# EAGLE board BHONoff (EAGLE 8.3.2)
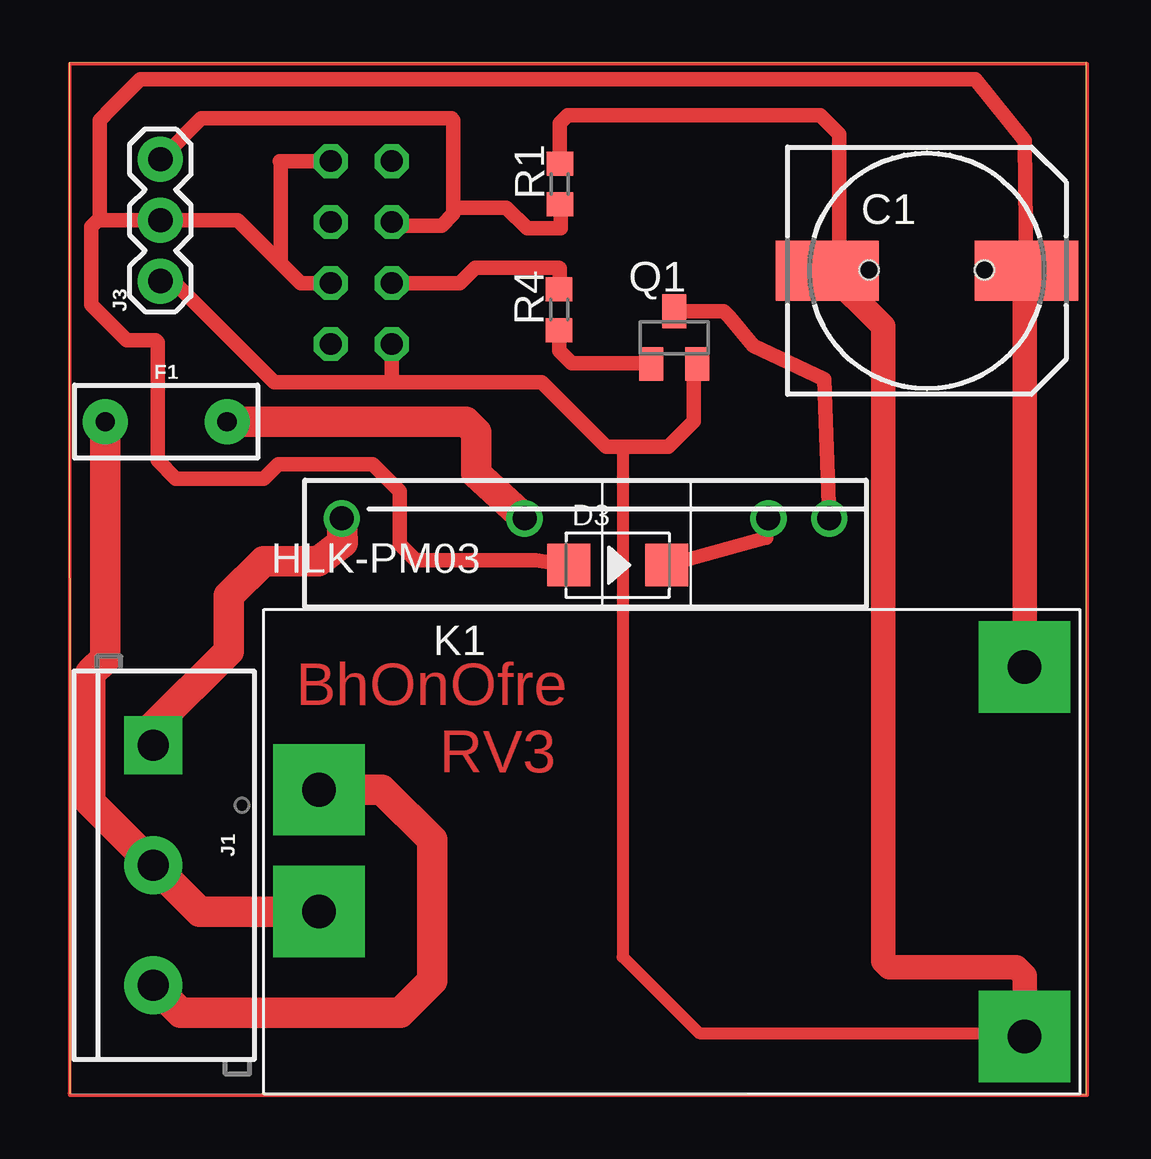
[diagram p0: board, top side]
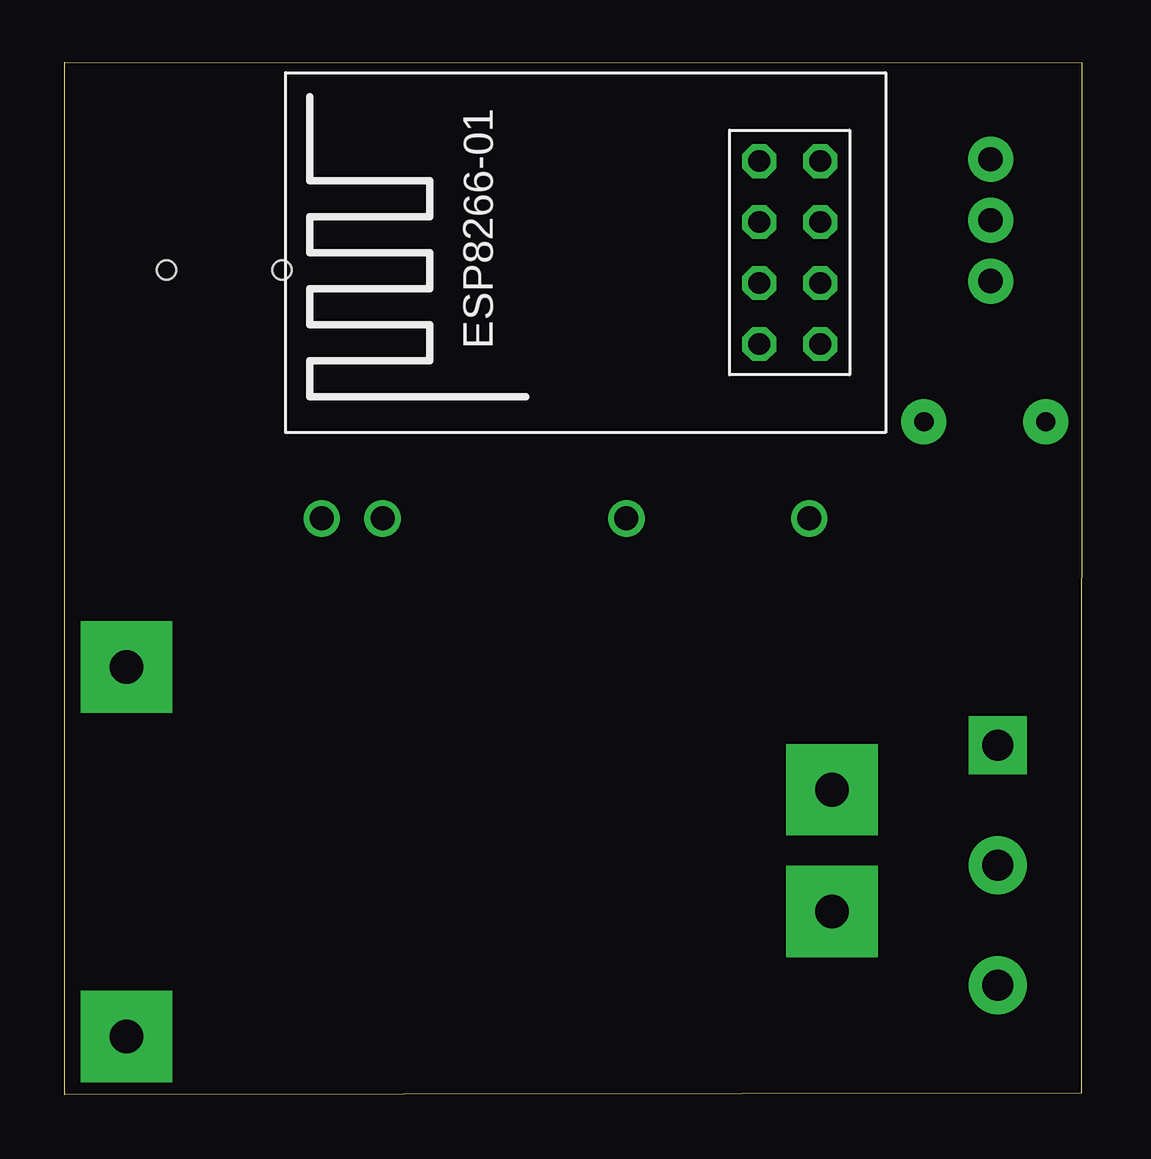
[diagram p1: board, bottom side, seen from below]

Size 42.38 x 43.01 mm. Coordinates in mm from the lower left corner, seen from the top.
Outline: 0.03,0.06 42.38,0 42.38,43.01 0,43 0.03,0.06
Copper layers (1*16): Top 0.035mm / dielectric 1.5mm / Bottom 0.035mm
Design rules "default": minimum track width 6mil, minimum drill 0.35mm, track to track 6mil, track to pad 6mil, pad to pad 6mil, via to via 6mil, smd to smd 6mil, copper to edge 40mil, drill to drill 6mil, minimum pad ring 10mil, minimum via ring 8mil, stop-mask expansion 4mil, vias tented up to drill 0mil, thermal gap 10mil
Net classes: 1 220V: clearance 2.54 mm
Holes 0.8 mm at 33.32,34.36 38.14,34.36

## Footprints (pad centres in the part's own frame; a part is rotated, then mirrored left to right if it is on the bottom)
140CLH-1010 = smd 4.3 x 2.5: + 4.15,0; - -4.15,0
DO-214AC = smd 1.8 x 1.77: 1 -2.042,0; 2 2.042,0
PTH = drill 0.8 pad 1.88: P$1 -2.54,0; P$2 2.54,0
SCREWTERMINAL-5MM-3 = drill 1.3 pad 2.413 square: 1 0,0 | drill 1.3 pad 2.413: 2 5,0; 3 10,0
1X03 = drill 1.016 pad 1.88: 1 0,0; 2 2.54,0; 3 5.08,0
OMRON-G3MB-202P-SSR = drill 1: 1 -12.7,0; 2 -5.08,0; 3 5.08,0; 4 7.62,0
SOT23 = smd 1 x 1.4: 1 -0.95,-1.1; 2 0.95,-1.1; 3 0,1.1
R0603 = smd 1 x 1.1: 1 -0.85,0; 2 0.85,0
HLK-PM03 = drill 1.4 pad 3.81 square: +VO 29.4,10.2; -VO 29.4,-5.2; AC1 0,5.08; AC2 0,0
ESP8266-01 = drill 0.9 octagon: 3V3 -1.27,-3.81; CH_PD -1.27,1.27; GND 1.27,3.81; GPIO0 1.27,-1.27; GPIO2 1.27,1.27; RST -1.27,-1.27; RX 1.27,-3.81; TX -1.27,3.81

## Placement (x,y rotation side)
C1  1000uf  [140CLH-1010]  35.74,34.33 0 top
D3  1N4004  [DO-214AC]  22.85,22.06 0 top
F1  FUSE 2A  [PTH]  4.04,28.04 0 top
J1  [SCREWTERMINAL-5MM-3]  3.5,14.56 270 top
J3  [1X03]  3.8,33.9 90 top
K1  OMRON-G3MB-202P-SSR2  [OMRON-G3MB-202P-SSR]  24.05,24.01 0 top
Q1  S8050  [SOT23]  25.21,31.54 0 top
R1  47k  [R0603]  20.44,37.95 90 top
R4  47k  [R0603]  20.41,32.71 90 top
U$2  HLK-PM03  [HLK-PM03]  10.41,7.63 0 top
U$3  ESP8266-01  [ESP8266-01]  12.17,35.09 180 bottom

## Library data of the parts
C1 = adafruit
D3 = Seeed-Diode; MPN: 1N4007
F1 = SparkFun-Fuses; PROD_ID: RES-08490
J1 = SparkFun-Connectors; PROD_ID: CONN-10134; SF_SKU: PRT-08433
J3 = SparkFun-Connectors
K1 = Omron G3MB 202p SSR; MPN: S202S02F; OC_FARNELL: 1618475; OC_NEWARK: 14N9588
Q1 = semicon-smd-ipc
R1 R4 = resistor
U$2 = PowerSocket
U$3 = captain-slow

## Nets
CH1: R4.2 U$3.GPIO2
GND: C1.- J3.1 Q1.2 R1.2 U$2.-VO U$3.GND
N$1: K1.4 Q1.3
N$2: J1.1 K1.1
N$4: F1.P$1 J1.2 U$2.AC2
N$5: J1.3 U$2.AC1
N$7: F1.P$2 K1.2
N$8: D3.2 K1.3
N$9: Q1.1 R4.1
TOUCH: J3.3 R1.1 U$3.GPIO0
VCC: C1.+ D3.1 J3.2 U$2.+VO U$3.3V3 U$3.CH_PD

## Tracks (layer width: path | path; a pad name or v marks a point on that pad's centre or on a via)
CH1
  Top 0.61: U$3.GPIO2 16.27,33.82 16.92,34.46 20.4,34.46 20.44,34.43 20.44,33.59 R4.2
GND
  Top 0.508: 23.06,27 23.06,5.74 26.24,2.56 39.67,2.56 U$2.-VO
  Top 0.61: J3.1 4.33,33.9 8.54,29.69 13.32,29.69 | 13.32,29.69 19.68,29.69 22.37,27 23.06,27 24.95,27 26.01,28.06 26.01,30.29 Q1.2 | U$3.GND 13.44,29.81 13.32,29.69 | C1.- 32.07,34.82 32.07,40.01 31.29,40.8 20.77,40.8 20.44,40.47 R1.2
  Top 1.016: C1.- 33.91,32.01 33.91,5.57 34.16,5.32 39.46,5.32 39.81,4.96 U$2.-VO
N$1
  Top 0.61: Q1.3 27.28,32.64 27.5,32.42 28.5,31.2 31.46,29.82 K1.4
N$2
  Top 1.27: K1.1 11.4,23 10.38,22.22 8.09,22.23 6.65,20.78 6.65,18.48 3.5,15.34 J1.1
N$3
  Top 0.15: -0.01,0.06 0.03,0.06 | 0.03,0.06 0.03,42.96 42.28,42.96 | 0.03,0.06 0.03,-0.02 42.42,-0.02 42.42,42.96
N$4
  Top 1.27: F1.P$1 1.5,18.17 0.89,17.55 0.89,12.18 3.21,9.86 | 3.21,9.86 J1.2 | U$2.AC2 5.43,7.63 3.21,9.86
N$5
  Top 1.27: U$2.AC1 13.03,12.71 15.13,10.61 15.13,4.74 13.8,3.42 4.64,3.42 J1.3
N$7
  Top 1.27: F1.P$2 16.51,28.04 16.95,27.6 16.95,25.87 K1.2
N$8
  Top 0.61: D3.2 29.04,23.21 K1.3
N$9
  Top 0.61: R4.1 20.41,31 20.93,30.48 24.22,30.48 Q1.1
TOUCH
  Top 0.61: J3.3 5.51,40.68 15.93,40.68 16.01,40.6 16.01,36.97 | 16.01,36.97 16.01,36.7 15.51,36.21 13.59,36.21 U$3.GPIO0 | 16.01,36.97 18.2,36.97 19.08,36.09 20.48,36.09 20.48,37.06 R1.1
VCC
  Top 0.61: U$3.3V3 8.77,38.9 8.8,38.86 8.8,34.65 | U$3.CH_PD 9.64,33.82 8.8,34.65 | 39.84,33.86 C1.+ 39.81,39.76 37.76,42.31 2.97,42.31 1.76,41.1 | 8.8,34.65 7.02,36.44 J3.2 1.19,36.44 | 1.19,36.44 0.92,36.17 0.92,32.91 2.4,31.43 3.61,31.43 3.69,31.36 3.69,26.43 4.45,25.67 8.1,25.67 8.71,26.27 12.64,26.27 13.76,25.15 13.76,22.94 14.43,22.27 19.44,22.27 D3.1 | 1.76,41.1 1.26,40.6 1.26,36.51 1.19,36.44 | 1.76,41.1
  Top 1.016: C1.+ 39.81,34.26 U$2.+VO

## Text on the board
Top: BhOnOfre | RV3